# Altium PCB Serial Power Supply.PcbDoc (part 1 of 2)
Units mm, origin at the board's own origin, x right, y up, seen from the top; angles counter-clockwise.
Board outline 122 x 87 mm, 4 copper layers (Top Layer, Signal Layer 1, Signal Layer 2, Bottom Layer), stack 0.844 mm thick; 122 components, 75 nets, 373 pads, 97 vias.
Unrouted connection lines stored in the file: 7.
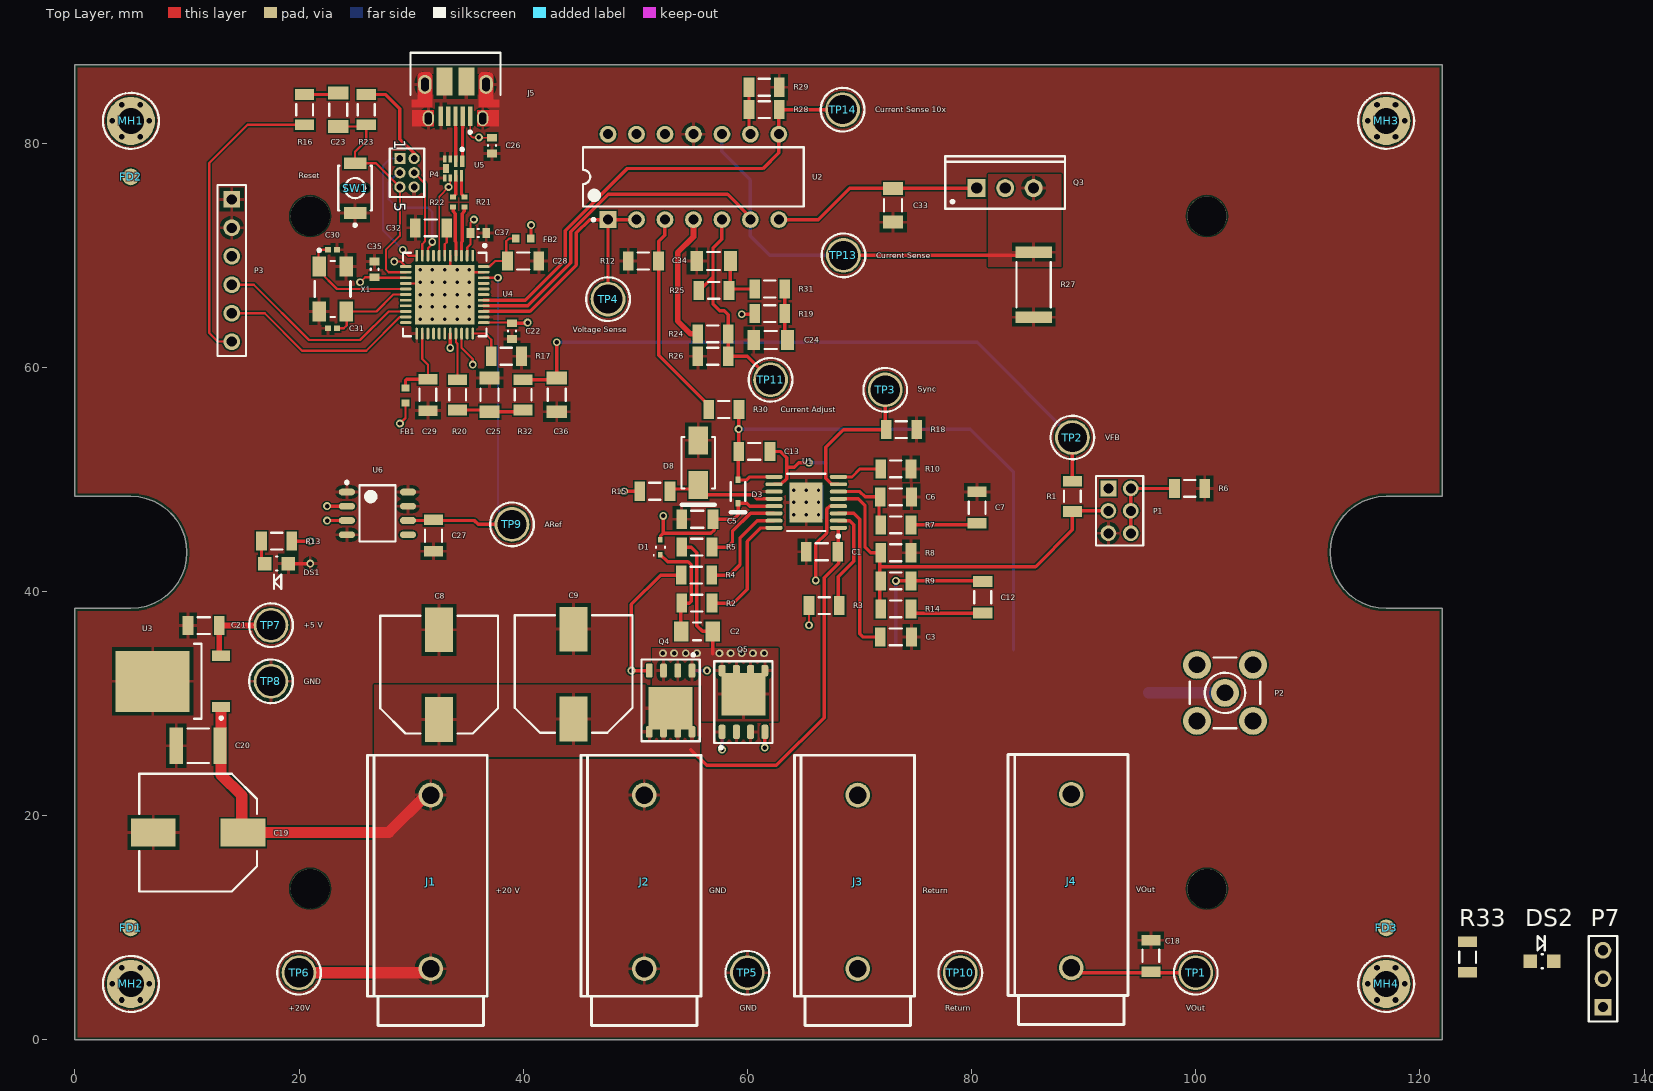
[diagram p0: Top Layer view]
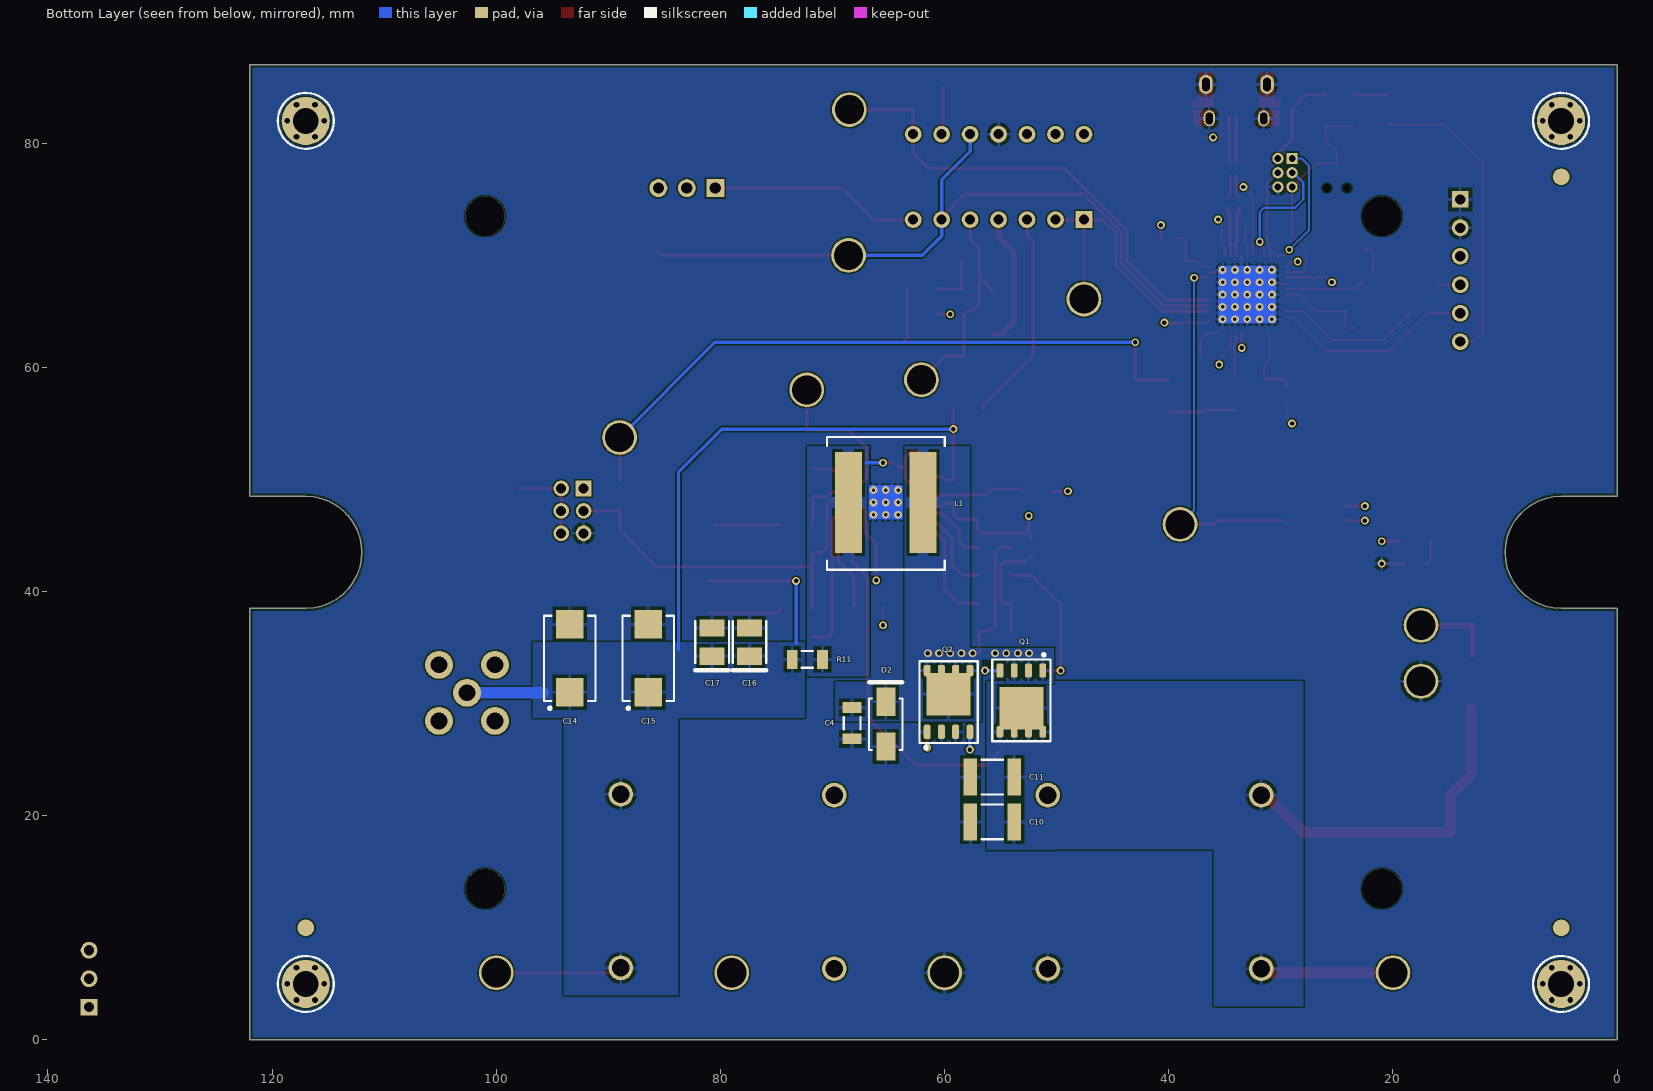
[diagram p1: Bottom Layer view, seen from below]
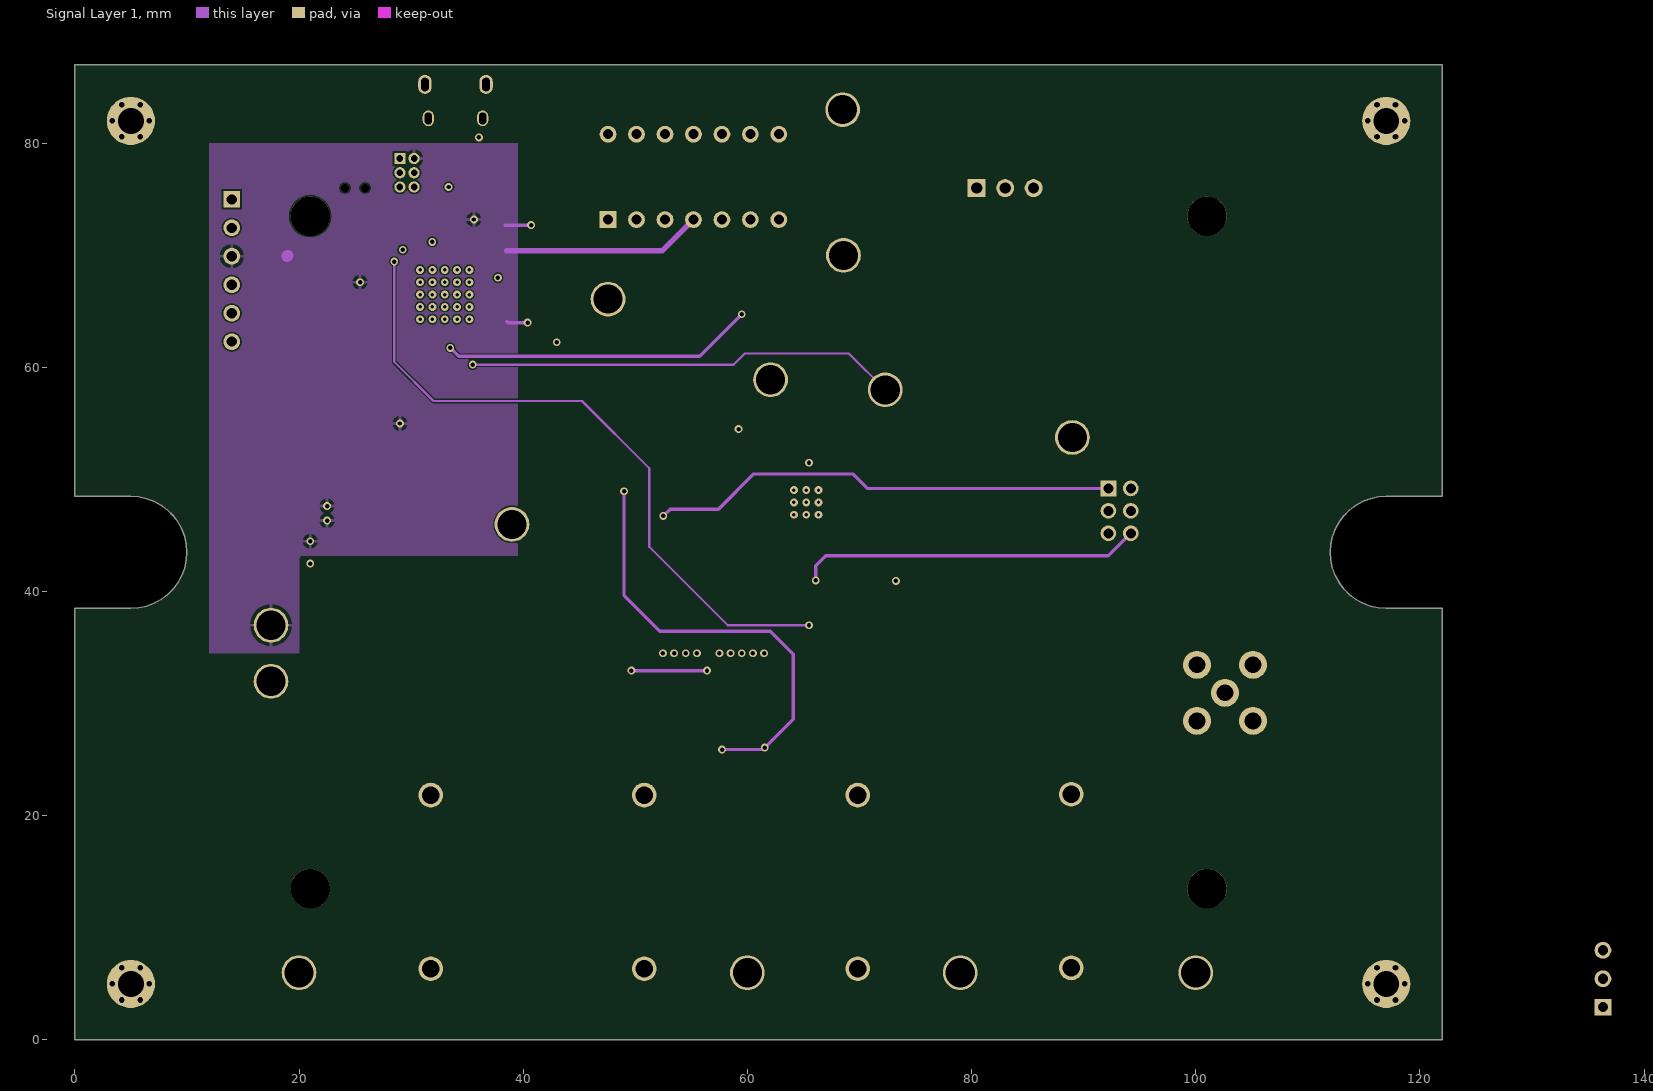
[diagram p2: Signal Layer 1]
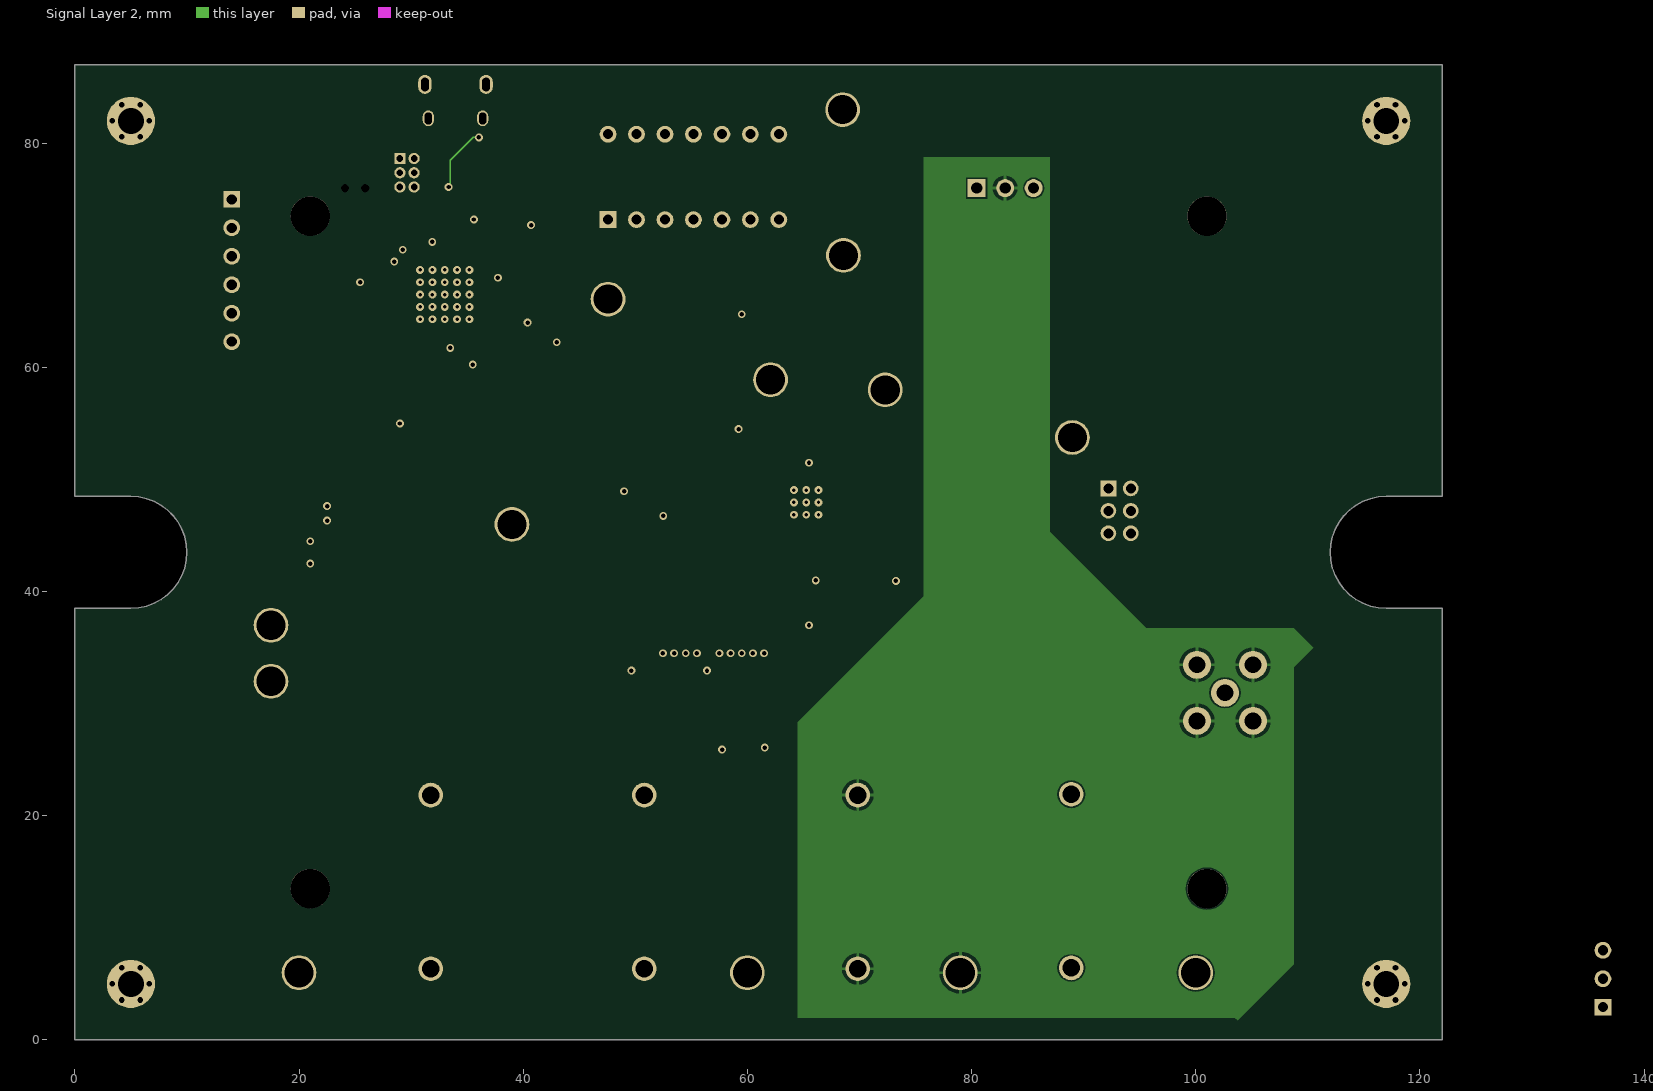
[diagram p3: Signal Layer 2]
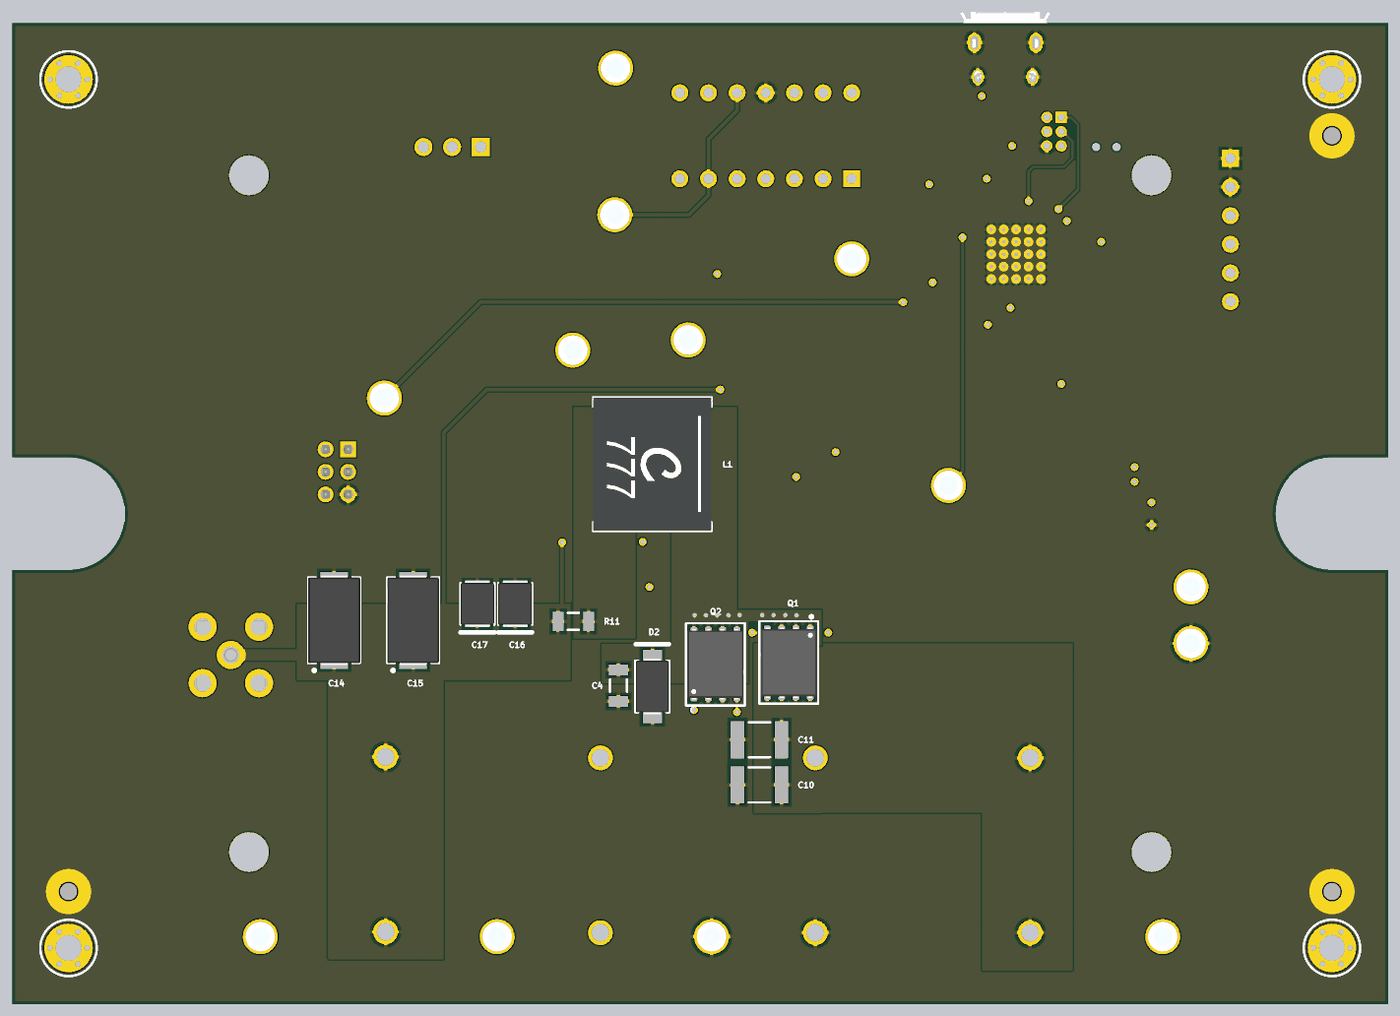
[diagram p5: 3D render of the assembled board from below, using the file's embedded part models]

## Layer stack, top to bottom
Top Solder: solder mask 0.0102, Solder Resist, Dk 3.5
Top Layer: signal copper 0.0356
Dielectric 1: core 0.32, FR-4, Dk 4.8
Signal Layer 1: signal copper 0.036
Dielectric 3: prepreg 0.127, Dk 4.2
Signal Layer 2: signal copper 0.036
Dielectric 2: core 0.254, Dk 4.2
Bottom Layer: signal copper 0.0356
Bottom Solder: solder mask 0.0102, Solder Resist, Dk 3.5

## Board outline
0,38.5 0,0 122,0 122,38.5 117,38.5 116.288,38.551 115.591,38.703 114.923,38.952 114.297,39.294 113.726,39.721 113.221,40.226 112.794,40.797 112.452,41.423 112.203,42.091 112.051,42.788 112,43.5 112.051,44.212 112.203,44.909 112.452,45.577 112.794,46.203 113.221,46.774 113.726,47.279 114.297,47.706 114.923,48.048 115.591,48.297 116.288,48.449 117,48.5 122,48.5 122,87 0,87 0,48.5 5,48.5 5.712,48.449 6.409,48.297 7.077,48.048 7.703,47.706 8.274,47.279 8.779,46.774 9.206,46.203 9.548,45.577 9.797,44.909 9.949,44.212 10,43.5 9.949,42.788 9.797,42.091 9.548,41.423 9.206,40.797 8.779,40.226 8.274,39.721 7.703,39.294 7.077,38.952 6.409,38.703 5.712,38.551 5,38.5

## Design rules (kind name [scope] priority, off if disabled: settings)
BoardOutlineClearance [All] p1: gap=0.26 ignorepadtopadclearanceinfootprint=FALSE
Clearance "Pad-Pad Clearance" [All] p1 off: gap=0.15 ignorepadtopadclearanceinfootprint=FALSE except(0: Arc-Hole Track-Hole SMDPad-Hole THPad-Hole Via-Hole Fill-Hole Poly-Hole Region-Hole Text-Hole)
Clearance "Via-Pad Clearance" [IsVia vs IsPad] p2: gap=0.15 ignorepadtopadclearanceinfootprint=FALSE except(0: Arc-Hole Track-Hole SMDPad-Hole THPad-Hole Via-Hole Fill-Hole Poly-Hole Region-Hole Text-Hole)
Clearance "General Clearance" [All] p3: gap=0.127 ignorepadtopadclearanceinfootprint=FALSE
ComponentClearance [All] p1: gap=0.25 collisioncheckmode=3 verticalgap=0.25 showdistances=TRUE
DiffPairsRouting [All] p1: maxlimit=0.3 minlimit=0.225 mostfreqgap=0.25 toplayer_minwidth=0.25 toplayer_maxwidth=0.3 toplayer_prefwidth=0.275 midlayer1_minwidth=0.25 midlayer1_maxwidth=0.3 midlayer1_prefwidth=0.275 midlayer2_minwidth=0.25 midlayer2_maxwidth=0.3 midlayer2_prefwidth=0.275 bottomlayer_minwidth=0.25 bottomlayer_maxwidth=0.3 bottomlayer_prefwidth=0.275 maxuncoupledlength=12
FabricationTestPointUsage TestPointUsage [All] p1: valid=0 allowmultiple=FALSE
FabricationTestpoint Testpoint [All] p1: side=3 testpointundercomponent=TRUE minsize=1.016 maxsize=2.54 preferedsize=1.524 minholesize=0 maxholesize=1.016 preferedholesize=0.813 testpointgrid=0.025 allowsidetop=TRUE allowsidebottom=TRUE usegrid=TRUE gridtolerance=0
Height [All] p1: minheight=0 maxheight=20 prefheight=1.25
HoleSize HoleSize_VIA [IsVia] p1: absolutevalues=TRUE maxlimit=1 minlimit=0.305 maxpercent=80.000 minpercent=20.000
HoleSize HoleSize_NonPlated [(ObjectKind = 'Pad') And (PadIsPlated = 'False')] p2: absolutevalues=TRUE maxlimit=200 minlimit=0.2 maxpercent=80.000 minpercent=20.000
HoleSize [All] p3: absolutevalues=TRUE maxlimit=6 minlimit=0.305 maxpercent=80.000 minpercent=20.000
HoleToHoleClearance [All] p1: gap=0.25 allowstackedmicrovias=TRUE
MatchedLengths DiffPair_MatchedLengths [IsDifferentialPair] p1: tolerance=25 checknetsindiffpair=TRUE checkdiffpairvsdiffpair=FALSE checkxsignals=FALSE checkothers=FALSE
MinimumAnnularRing MinimumAnnularRing_VIA [IsVia] p1: minimumring=0.102
MinimumAnnularRing MinimumAnnularRing_NonPlated [(ObjectKind = 'Pad') And (PadIsPlated = 'False')] p2 off: minimumring=-100
MinimumAnnularRing [All] p3: minimumring=0.102
MinimumSolderMaskSliver [All] p1: minsoldermaskwidth=0.076
MinimumSolderMaskSliver SilkscreenOverComponentPads [All] p2 off: minsoldermaskwidth=0.254
PlaneClearance [All] p1: clearance=0.3
PlaneConnect [All] p1: planeconnectstyle=Relief reliefexpansion=0.5 reliefentries=4 reliefconductorwidth=0.25 reliefairgap=0.25
PolygonConnect PolygonConnect_2 [IsVia vs InNet('NetC2_2')] p1: connectstyle=Direct reliefconductorwidth=0.254 reliefentries=4 polygonreliefangle="90 Angle" airgapwidth=0.254
PolygonConnect PolygonConnect_1 [InComponent('L1')] p2: connectstyle=Relief reliefconductorwidth=1 reliefentries=4 polygonreliefangle="90 Angle" airgapwidth=0.25
PolygonConnect PolygonConnect_3 [InComponent('U1') vs IsVia] p3: connectstyle=Direct reliefconductorwidth=1 reliefentries=4 polygonreliefangle="90 Angle" airgapwidth=0.25
PolygonConnect [All] p4: connectstyle=Relief reliefconductorwidth=0.3 reliefentries=4 polygonreliefangle="90 Angle" airgapwidth=0.3
RoutingCorners [All] p1: cornerstyle=45-Degree minsetback=2.5 maxsetback=2.5
RoutingVias [All] p1: holewidth=0.4 width=0.7 viastyle="Through Hole" minholewidth=0.3 minwidth=0.35 maxholewidth=2 maxwidth=3
ShortCircuit ShortCircuit_NoNet [Net = 'No Net' vs Net = 'No Net'] p1: allowed=TRUE
ShortCircuit [All] p2: allowed=FALSE
SilkToSilkClearance [All] p1: silktosilkclearance=0.25
SilkToSolderMaskClearance [IsPad] p1: minsilkscreentomaskgap=0.2 clearancetoexposedcopper=TRUE
SolderMaskExpansion SolderMaskExpansion_VIA [IsVia] p1: expansion=-100
SolderMaskExpansion [All] p2: expansion=0.075
Width [All] p1: maxlimit=10 minlimit=0.127 preferedwidth=0.3
16 further rules are at their usual default settings.

## Classes and differential pairs
component class U_Mechanical: FD1 FD2 FD3 MH1 MH2 MH3 MH4 S1
component class "U_Current Regulator": C33 Q3 R24 R25 R26 R27 R28 R29 S1 TP10 TP11 TP13 TP14
component class U_Controller: C22 C23 C24 C25 C26 C27 C28 C29 C30 C31 C32 C34 C35 C36 C37 DS1 DS2 FB1 FB2 J5 P3 P4 P7 R13 R16 R17 R19 R20 R21 R22 R23 R31 R32 R33 SW1 TP9 U4 U5 U6 X1
component class "Serial Power Supply - Main": C19 C20 C21 J1 J2 J3 J4 P2 TP5 TP6 TP7 TP8 U3
component class "U_DC-DC Converter": C1 C2 C3 C4 C5 C6 C7 C8 C9 C10 C11 C12 C13 C14 C15 C16 C17 C18 C? D1 D2 D3 D4 D8 D? L1 P1 Q1 Q2 Q4 Q5 R1 R2 R3 R4 R5 R6 R7 R8 R9 R10 R11 R12 R14 R15 R18 R30 TP1 TP2 TP3 TP4 U1 U2
differential pair USB_2: +USB_2_P -USB_2_N
differential pair USB_1: +USB_1_P -USB_1_N
differential pair USB: +USB_P -USB_N

## Components (designator, comment, footprint, x,y, rotation, side; value= is the part's Value field where it differs from the comment)
C1 "CAP 470nF 100V 1206(3216)" CAPC1206(3216)130_L 66.65,43.556 r0 top value=470nF
C2 "C1206C104K5RACTU" KEMT-1206-2_N 55.497,36.456 r0 top
C3 "CAP 1.5nF 50V 1206(3216)" CAPC1206(3216)170_L 73.25,35.956 r180 top value=1.5nF
C4 "CAP 470pF 50V 1206(3216)" CAPC1206(3216)100_L 68.25,28.261 r90 bottom value=470pF
C5 "CAP 1uF 25V 1206(3216)" CAPC1206(3216)190_L 55.539,46.456 r0 top value=1uF
C6 "CAP 100pF 50V 1206(3216)" CAPC1206(3216)170_L 73.25,48.456 r180 top value=100pF
C7 "CAP 2.2nF 50V 1206(3216)" CAPC1206(3216)130_L 80.5,47.5 r270 top value=2.2nF
C8 "UCZ1J470MCS1GS" NIC-CAPA2-10X10_V 32.5,32.595 r90 top locked
C9 "UCZ1J470MCS1GS" NIC-CAPA2-10X10_V 44.5,32.65 r90 top locked
C10 "CAP 2.2uF 100V 1812(4532)" CAPC1812(4532)280_L 55.75,19.456 r180 bottom value=2.2uF
C11 "CAP 2.2uF 100V 1812(4532)" CAPC1812(4532)280_L 55.75,23.456 r180 bottom value=2.2uF
C12 "CAP 10nF 50V 1206(3216)" CAPC1206(3216)170_L 81,39.5 r90 top value=10nF
C13 "CAP1206" CAPC1206(3216)150_L 60.619,52.506 r0 top
C14 "TCJE686M025R0050" KEMT-520-D_N 93.45,34.05 r90 bottom
C15 "TCJE686M025R0050" KEMT-520-D_N 86.45,34.05 r90 bottom
C16 "TAJB226K016RNJ" AVX-TAJ-B-2_L 77.411,35.5 r90 bottom
C17 "TAJB226K016RNJ" AVX-TAJ-B-2_L 80.75,35.5 r90 bottom
C18 "CAP 1uF 25V 1206(3216)" CAPC1206(3216)190_L 96,7.5 r270 top value=1uF
C19 "UCZ1J470MCS1GS" NIC-CAPA2-10X10_V 11,18.5 r180 top
C20 "CAP 2.2uF 100V 1812(4532)" CAPC1812(4532)280_L 11,26.25 r0 top value=2.2uF
C21 "CAP 100nF 50V 1206(3216)" CAPC1206(3216)100_L 11.5,36.975 r180 top value=100nF
C22 "CAP 10uF 6.3V 0603(1608)" CAPC0603(1608)100_L 39,63.25 r90 top value=10uF
C23 "CAP 100nF 50V 1206(3216)" CAPC1206(3216)100_N 23.5,83 r270 top value=100nF
C24 "CAP 100nF 50V 1206(3216)" CAPC1206(3216)100_N 62.071,62.45 r180 top value=100nF
C25 "CAP 100nF 50V 1206(3216)" CAPC1206(3216)100_N 37,57.55 r90 top value=100nF
C26 "CAP 10uF 6.3V 0603(1608)" CAPC0603(1608)100_L 37.22,79.8 r90 top value=10uF
C27 "CAP 1uF 25V 1206(3216)" CAPC1206(3216)190_L 32,45 r90 top value=1uF
C28 "CAP 1uF 25V 1206(3216)" CAPC1206(3216)190_L 40,69.5 r180 top value=1uF
C29 "CAP 1uF 25V 1206(3216)" CAPC1206(3216)190_L 31.5,57.55 r90 top value=1uF
C30 "CAP 10pF 10V 0402(1005)" CAPC0402(1005)60_L 23,70.5 r180 top value=10pF
C31 "CAP 10pF 10V 0402(1005)" CAPC0402(1005)60_L 23,63.5 r0 top value=10pF
C32 "CAP 1uF 25V 1206(3216)" CAPC1206(3216)190_L 31.772,72.46 r0 top value=1uF
C33 "CAP 100nF 50V 1206(3216)" CAPC1206(3216)100_N 73,74.46 r270 top value=100nF
C34 "CAP 100nF 50V 1206(3216)" CAPC1206(3216)100_N 56.981,69.5 r180 top value=100nF
C35 "CAP 10uF 6.3V 0603(1608)" CAPC0603(1608)100_L 26.75,68.75 r270 top value=10uF
C36 "CAP 100nF 50V 1206(3216)" CAPC1206(3216)100_N 43,57.55 r270 top value=100nF
C37 "CAP 10uF 6.3V 0603(1608)" CAPC0603(1608)100_L 36,72 r180 top value=10uF
D1 "BAS16XV2T1" ONSC-SOD-523-2-502-01_V 52.25,43.956 r90 top
D2 "B160-13-F" DIOD-SMA-2_V 65.25,28.175 r90 bottom
D3 "1N4148WS-7-F" DIOD-SOD323-2-A_V 59.172,48.931 r270 top
D8 "B160-13-F" DIOD-SMA-2_V 55.62,51.5 r270 top
DS1 "LTST-C170GKT" LTST-C170GKT_V 18,42.5 r180 top
DS2 "LTST-C170GKT" LTST-C170GKT_V 130.907,7.026 r0 top
FB1 "BLM18HE152SN1D" MURA-BLM18-RF-H4-CHIP-2_V 29.5,57.5 r90 top
FB2 "BLM18HE152SN1D" MURA-BLM18-RF-H4-CHIP-2_V 40,71.5 r180 top
FD1 "Fiducial - Round" FID150X450 5,10 r0 top
FD2 "Fiducial - Round" FID150X450 5,77 r0 top
FD3 "Fiducial - Round" FID150X450 117,10 r0 top
J1 "+20 V" PCB-1KEG917TFGGG2K36Z9ZW-1 31.369,23.755 r270 top locked
J2 "GND" PCB-1KEG917TFGGG2K36Z9ZW-1 50.419,23.755 r270 top locked
J3 "Return" PCB-1KEG917TFGGG2K36Z9ZW-1 69.469,23.755 r270 top
J4 "VOut" PCB-1KEG917TFGGG2K36Z9ZW-1 88.519,23.834 r270 top locked
J5 "10103594-0001LF" FCI-10103594-0001LF_V 33.963,83.86 r180 top
L1 "XAL1010-682MEB" INDP113100X100N 65.25,47.956 r0 bottom
MH1 "Mounting-Hole-Screw" MTG_M2_PV 5,82 r0 top locked
MH2 "Mounting-Hole-Screw" MTG_M2_PV 5,5 r0 top locked
MH3 "Mounting-Hole-Screw" MTG_M2_PV 117,82 r0 top locked
MH4 "Mounting-Hole-Screw" MTG_M2_PV 117,5 r0 top locked
P1 "TMMH-103-06-T-D" SMTC-TMMH-103-06-X-D 92.212,49.206 r270 top
P2 "SMB" SMB_V-RJ45 102.612,30.971 r0 top
P3 "Header 6" HDR1X6 14,75 r270 top
P4 "MHDR2X3" MHDR2X3 29,78.64 r270 top
P7 "Header 3" HDR1X3 136.332,2.925 r90 top
Q1 "Si7370" SOIC127P620X112_HS-9N 51.25,32.956 r270 bottom
Q2 "Si7370" SOIC127P620X112_HS-9N 61.56,27.491 r90 bottom
Q3 "MTP3055" TO-220AB 83,76 r0 top
Q4 "Si7370" SOIC127P620X112_HS-9N 55.06,32.956 r270 top
Q5 "Si7370" SOIC127P620X112_HS-9N 57.75,27.491 r90 top
R1 "10K 1% 1206(3216)" RESC1206(3216)_L 89,48.5 r270 top value="10000.00 Ohm"
R2 "Jumper 1206(3216)" RESC1206(3216)_L 55.5,38.968 r180 top value="0.00 Ohm"
R3 "100K 1% 1206(3216)" RESC1206(3216)_L 66.85,38.75 r0 top value="100K Ohms"
R4 "Jumper 1206(3216)" RESC1206(3216)_L 55.46,41.468 r180 top value="0.00 Ohm"
R5 "Jumper 1206(3216)" RESC1206(3216)_L 55.5,43.968 r180 top value="0.00 Ohm"
R6 "5M1 1% 1206(3216)" RESC1206(3216)_L 99.462,49.206 r180 top value="5100000.00 Ohm"
R7 "30K9 1% 1206(3216)" RESC1206(3216)_L 73.25,45.956 r180 top value="30.9K Ohm"
R8 "10K 1% 1206(3216)" RESC1206(3216)_L 73.25,43.468 r180 top value="10000.00 Ohm"
R9 "100K 1% 1206(3216)" RESC1206(3216)_L 73.25,40.956 r0 top value="100000.00 Ohm"
R10 "118K 1% 1206(3216)" RESC1206(3216)_L 73.25,50.956 r180 top value="118K Ohm"
R11 "WSLP12066L000FEA" RESC1206(3216)_L 72.25,33.956 r0 bottom value="6 mOhm"
R12 "10K 1% 1206(3216)" RESC1206(3216)_L 50.725,69.5 r180 top value="10000.00 Ohm"
R13 "10K 1% 1206(3216)" RESC1206(3216)_L 18,44.5 r180 top value="10000.00 Ohm"
R14 "Jumper 1206(3216)" RESC1206(3216)_L 73.25,38.456 r0 top value="0.00 Ohm"
R15 "Jumper 1206(3216)" RESC1206(3216)_L 51.75,48.956 r180 top value="0.00 Ohm"
R16 "Jumper 1206(3216)" RESC1206(3216)_L 20.5,83 r90 top value="0.00 Ohm"
R17 "10K 1% 1206(3216)" RESC1206(3216)_L 38.5,61 r0 top value="10000.00 Ohm"
R18 "100K 1% 1206(3216)" RESC1206(3216)_L 73.75,54.456 r180 top value="100K Ohms"
R19 "5K1 1% 1206(3216)" RESC1206(3216)_L 62,64.8 r180 top value="5.1K Ohm"
R20 "5K1 1% 1206(3216)" RESC1206(3216)_L 34.15,57.55 r90 top value="5.1K Ohm"
R21 "22R 1% 0402(1005)" RESC0402(1005)_L 34.75,74.75 r270 top value="22.00 Ohm"
R22 "22R 1% 0402(1005)" RESC0402(1005)_L 33.75,74.75 r270 top value="22.00 Ohm"
R23 "10K 1% 1206(3216)" RESC1206(3216)_L 26,83 r90 top value="10000.00 Ohm"
R24 "Jumper 1206(3216)" RESC1206(3216)_L 56.931,63 r180 top value="0.00 Ohm"
R25 "300K 1% 1206(3216)" RESC1206(3216)_L 57.015,66.875 r180 top value="300K Ohm"
R26 "10K 1% 1206(3216)" RESC1206(3216)_L 56.931,61 r0 top value="10000.00 Ohm"
R27 "0.01Ohms 1% 2512(6432)" RESC2512(6432)_L 85.54,67.38 r90 top value="0.01 Ohms"
R28 "90K9 1% 1206(3216)" RESC1206(3216)_L 61.5,83 r0 top value="90900.00 Ohm"
R29 "10K 1% 1206(3216)" RESC1206(3216)_L 61.5,85 r180 top value="10000.00 Ohm"
R30 "150K 1% 1206(3216)" RESC1206(3216)_L 57.9,56.25 r0 top value="150000.00 Ohm"
R31 "5K1 1% 1206(3216)" RESC1206(3216)_L 62,67 r0 top value="5.1K Ohm"
R32 "5K1 1% 1206(3216)" RESC1206(3216)_L 40,57.55 r270 top value="5.1K Ohm"
R33 "10K 1% 1206(3216)" RESC1206(3216)_L 124.256,7.401 r90 top value="10000.00 Ohm"
SW1 "Reset" JNFU-TVAF06_V 25,76 r90 top
TP1 "VOut" KSTN-1502-2 100,6 r0 top locked
TP2 "VFB" KSTN-1502-2 89,53.75 r0 top
TP3 "Sync" KSTN-1502-2 72.3,58 r0 top
TP4 "Voltage Sense" KSTN-1502-2 47.571,66.093 r90 top
TP5 "GND" KSTN-1502-2 60,6 r0 top locked
TP6 "+20V" KSTN-1502-2 20,6 r0 top locked
TP7 "+5 V" KSTN-1502-2 17.5,37.006 r0 top
TP8 "GND" KSTN-1502-2 17.5,32 r0 top
TP9 "ARef" KSTN-1502-2 39,46 r0 top
TP10 "Return" KSTN-1502-2 79,6 r0 top locked
TP11 "Current Adjust" KSTN-1502-2 62.071,58.9 r270 top
TP13 "Current Sense" KSTN-1502-2 68.575,70 r90 top
TP14 "Current Sense 10x" KSTN-1502-2 68.5,83 r90 top
U1 "LT3845MPFE" LT-FE-16-EPV-BC_N 65.25,47.956 r180 top locked
U2 "LM324N" N14A 55.191,77 r90 top locked
U3 "LM78M05CDT" TD03B_L 8.75,32 r180 top
U4 "ATmega32U4-MU" 44PW_M 33,66.5 r270 top
U5 "EMI2121MTTAG" ONSC-WDFN-8-511BN_V 33.75,77.75 r270 top
U6 "LM4140ACM10NOPB" D0008A_N 27,46.981 r0 top
X1 "ABM3B-16.000MHZ-B2-T" ABRA-ABM3B-4_V 23,67 r270 top

## Footprints (in the part's own frame and the unit in brackets; to place one, negate y for a bottom-side part, rotate by r counter-clockwise, add the part's x,y. Pads: shape width x height; smd on the part's side, far side on the other; paste and mask are expansions set on the pad)
44PW_M [mm] "QFN, 44-Leads, Body 7x7mm, Pitch 0.5mm, Thermal Pad 5.3x5.3mm, IPC Low Density"
  oval 1.05x0.25 smd: 1(-3.475,2.5) 2(-3.475,2) 3(-3.475,1.5) 4(-3.475,1) 5(-3.475,0.5) 6(-3.475,0) 7(-3.475,-0.5) 8(-3.475,-1) 9(-3.475,-1.5) 10(-3.475,-2) 11(-3.475,-2.5) 23(3.475,-2.5) 24(3.475,-2) 25(3.475,-1.5) 26(3.475,-1) 27(3.475,-0.5) 28(3.475,0) 29(3.475,0.5) 30(3.475,1) 31(3.475,1.5) 32(3.475,2) 33(3.475,2.5)
  oval 0.25x1.05 smd: 12(-2.5,-3.475) 13(-2,-3.475) 14(-1.5,-3.475) 15(-1,-3.475) 16(-0.5,-3.475) 17(0,-3.475) 18(0.5,-3.475) 19(1,-3.475) 20(1.5,-3.475) 21(2,-3.475) 22(2.5,-3.475) 34(2.5,3.475) 35(2,3.475) 36(1.5,3.475) 37(1,3.475) 38(0.5,3.475) 39(0,3.475) 40(-0.5,3.475) 41(-1,3.475) 42(-1.5,3.475) 43(-2,3.475) 44(-2.5,3.475)
  rect 5.3x5.3 smd: 45(0,0)
  silkscreen extent -4.5,-3.73 3.73,3.72, body extent -3.57,-3.58 3.58,3.57, height 0.9
ABRA-ABM3B-4_V [mm] "SMD, 4-Leads, Body 5x3.2mm"
  rect 1.8x1.2 smd: 1(-2,-1.2) 2(2,-1.2) 3(2,1.2) 4(-2,1.2)
  silkscreen extent -3.57,-1.6 2.5,1.6, body extent -2.5,-1.59 2.5,1.59, height 1.13
AVX-TAJ-B-2_L [mm] "Molded Capacitor, 2-Leads, Body 3.7x3mm, IPC High Density"
  rect 1.55x2.2 smd: 1(-1.25,0) 2(1.25,0)
  silkscreen extent -2.52,-1.5 1.85,1.5, body extent -2.07,-1.5 2.07,1.5, height 2.1
CAPC0402(1005)60_L [mm] "Chip Capacitor, Body 1.0x0.5mm, Height 0.6mm, IPC High Density"
  rect 0.52x0.52 smd: 1(-0.4,0) 2(0.4,0)
  body extent -0.55,-0.3 0.55,0.3, height 0.6
CAPC0603(1608)100_L [mm] "Chip Capacitor, Body 1.6x0.8mm, Height 1.0mm, IPC High Density"
  rect 0.7x0.9 smd: 1(-0.7,0) 2(0.7,0)
  silkscreen extent -0.05,-0.35 0.05,0.35, body extent -0.87,-0.47 0.88,0.48, height 1
CAPC1206(3216)100_L [mm] "Chip Capacitor, Body 3.2x1.6mm, Height 1mm, IPC High Density"
  rect 0.95x1.7 smd: 1(-1.4,0) 2(1.4,0)
  silkscreen extent -0.55,-0.75 0.55,0.75, body extent -1.7,-0.9 1.7,0.9, height 1
CAPC1206(3216)100_N [mm] "Chip Capacitor, Body 3.2x1.6mm, Height 1mm, IPC Medium Density"
  rect 1.15x1.8 smd: 1(-1.5,0) 2(1.5,0)
  silkscreen extent -0.55,-0.8 0.55,0.8, body extent -1.7,-0.9 1.7,0.9, height 1
CAPC1206(3216)130_L [mm] "Chip Capacitor, Body 3.2x1.6mm, Height 1.3mm, IPC High Density"
  rect 0.95x1.7 smd: 1(-1.4,0) 2(1.4,0)
  silkscreen extent -0.55,-0.75 0.55,0.75, body extent -1.7,-0.9 1.7,0.9, height 1.3
CAPC1206(3216)150_L [mm]
  rect 0.95x1.7 smd: 1(-1.4,0) 2(1.4,0)
  silkscreen extent -0.55,-0.75 0.55,0.75, body extent -1.7,-0.9 1.7,0.9, height 1.5
CAPC1206(3216)170_L [mm] "Chip Capacitor, Body 3.2x1.6mm, Height 1.7mm, IPC High Density"
  rect 0.95x1.7 smd: 1(-1.4,0) 2(1.4,0)
  silkscreen extent -0.55,-0.75 0.55,0.75, body extent -1.7,-0.9 1.7,0.9, height 1.7
CAPC1206(3216)190_L [mm] "Chip Capacitor, Body 3.2x1.6mm, Height 1.9mm, IPC High Density"
  rect 0.95x1.7 smd: 1(-1.4,0) 2(1.4,0)
  silkscreen extent -0.55,-0.75 0.55,0.75, body extent -1.7,-0.9 1.7,0.9, height 1.9
CAPC1812(4532)280_L [mm] "Chip Capacitor, Body 4.5x3.2mm, Height 2.8mm, IPC High Density"
  rect 1.2x3.3 smd: 1(-1.95,0) 2(1.95,0)
  silkscreen extent -0.95,-1.55 0.95,1.55, body extent -2.4,-1.7 2.4,1.7, height 2.8
D0008A_N [mm] "SOIC, 8-Leads, Body 5x4mm, Pitch 1.27mm, IPC Medium Density"
  oval 1.45x0.6 smd: 1(-2.725,1.905) 2(-2.725,0.635) 3(-2.725,-0.635) 4(-2.725,-1.905) 5(2.725,-1.905) 6(2.725,-0.635) 7(2.725,0.635) 8(2.725,1.905)
  silkscreen extent -2.85,-2.5 1.6,2.88, body extent -3,-2.45 3,2.45, height 1.63
DIOD-SMA-2_V [mm] "Molded Diode, 2-Leads, Body 4.6x2.92mm"
  rect 2.5x1.7 smd: 1(-2,0) 2(2,0)
  silkscreen extent -2.3,-1.5 3.75,1.5, body extent -2.52,-1.46 2.52,1.46, height 2.4
DIOD-SOD323-2-A_V [mm] "SOD-323, 2-Leads, Body 1.7x1.3mm"
  rect 0.59x0.45 smd: 1(-1.055,0) 2(1.055,0)
  silkscreen extent -0.85,-0.65 1.85,0.65, body extent -0.85,-0.65 0.85,0.65, height 1.2
FCI-10103594-0001LF_V [mm] "SMD, 5-Leads, Body 8.04x5.62mm, Pitch 0.65 mm"
  rect 0.4x1.75 smd: 1(-1.3,1.435) 2(-0.65,1.435) 3(0,1.435) 4(0.65,1.435) 5(1.3,1.435)
  oval 1x1.4 hole 0.65 slot 1.05 at 90 deg: 6(-2.425,1.64) 7(2.425,1.64)
  oval 1.2x1.7 hole 0.7 slot 1.2 at 90 deg: 8(2.725,-1.39) 9(-2.725,-1.39)
  rect 1.425x2.5 smd: 10(-0.962,-1.64) 11(0.962,-1.64)
  Top Layer region: -3.9,0.91 -1.9,0.91 -1.9,2.37 -3.9,2.37
  Top Layer region: 3.9,2.37 1.9,2.37 1.9,0.91 3.9,0.91
  Top Layer region: -3.375,-0.04 -3.375,-2.09 -3.373,-2.129 -3.369,-2.167 -3.365,-2.185 -3.359,-2.203 -3.348,-2.239 -3.329,-2.277 -3.308,-2.312 -3.284,-2.344 -3.258,-2.374 -3.227,-2.401 -3.194,-2.426 -3.158,-2.446 -3.121,-2.464 -3.08,-2.477 -3.049,-2.483 -3.012,-2.488 -2.975,-2.49 -2.475,-2.49 -2.432,-2.488 -2.391,-2.482 -2.351,-2.471 -2.312,-2.456 -2.28,-2.439 -2.249,-2.421 -2.217,-2.397 -2.19,-2.37 -2.164,-2.342 -2.143,-2.312 -2.121,-2.277 -2.105,-2.241 -2.093,-2.209 -2.088,-2.192 -2.084,-2.175 -2.08,-2.155 -2.076,-2.134 -2.075,-2.112 -2.075,-2.09 -2.075,-0.04 -2.075,0.66 -3.9,0.66 -3.9,-0.04
  Top Layer region: 3.375,-0.04 3.375,-2.09 3.373,-2.129 3.369,-2.167 3.365,-2.185 3.359,-2.203 3.348,-2.239 3.329,-2.277 3.308,-2.312 3.284,-2.344 3.258,-2.374 3.227,-2.401 3.194,-2.426 3.158,-2.446 3.121,-2.464 3.08,-2.477 3.049,-2.483 3.012,-2.488 2.975,-2.49 2.475,-2.49 2.432,-2.488 2.391,-2.481 2.351,-2.471 2.312,-2.456 2.28,-2.439 2.249,-2.421 2.217,-2.396 2.19,-2.37 2.164,-2.342 2.143,-2.312 2.121,-2.277 2.105,-2.241 2.093,-2.209 2.088,-2.192 2.084,-2.175 2.08,-2.155 2.076,-2.134 2.075,-2.112 2.075,-2.09 2.075,-0.04 2.075,0.66 3.9,0.66 3.9,-0.04
  silkscreen extent -4.02,-4.21 4.02,2.98, body extent -4.02,-4.15 4.02,1.88, height 2.9
FID150X450 [mm] "Fiducial, Round, 1.5mm Pad, 4.5mm SM, Top and Bottom"
  round 1.5 smd mask+1.25: 1(0,0)
  round 1.5 smd far side mask+1.25: 2(0,0)
HDR1X3 [mm] "Connector; Header; 3 Position"
  rect 1.5x1.5 hole 0.9: 1(0,0)
  round 1.5 hole 0.9: 2(2.54,0) 3(5.08,0)
  silkscreen extent -1.27,-1.27 6.35,1.27
HDR1X6 [mm] "Connector; Header; 6 Position"
  rect 1.5x1.5 hole 0.9: 1(0,0)
  round 1.5 hole 0.9: 2(2.54,0) 3(5.08,0) 4(7.62,0) 5(10.16,0) 6(12.7,0)
  silkscreen extent -1.27,-1.27 13.97,1.27
INDP113100X100N [mm] "Precision Wire Wound Inductor, 2-Leads, Body 11.30x10.00mm, IPC Medium Density"
  rect 2.38x9 smd: 1(-3.325,0) 2(3.325,0)
  silkscreen extent -5.25,-5.85 5.25,6.01, body extent -5.25,-5.84 5.25,5.96, height 9.9
JNFU-TVAF06_V [mm] "Switch, Push Button, SMD, 2-Leads, Body 3x4mm"
  rect 1.05x2 smd: 1(-2.225,0) 2(2.225,0)
  round 0.4 hole 0.75 unplated: MH1(0,0.9) MH2(0,-0.9)
  silkscreen extent -3.42,-1.5 2,1.5, body extent -2,-1.5 2,1.5, height 2
KEMT-520-D_N [mm] "Molded Capacitor, 2-Leads, Body 7.6x4.6mm, IPC Medium Density"
  rect 2.55x2.45 smd: 1(-3.025,0) 2(3.025,0)
  silkscreen extent -4.57,-2.3 3.8,2.3, body extent -4.02,-2.3 4.02,2.3, height 3.1
KEMT-1206-2_N [mm] "SMD, 2-Leads, Body 3.4x1.8mm, IPC Medium Density"
  rect 1.3x1.8 smd: 1(-1.4,0) 2(1.4,0)
  silkscreen extent -0.35,-0.8 0.35,0.8, body extent -1.7,-0.9 1.7,0.9, height 0.88
KSTN-1502-2 [mm] "Terminal DBL Turret, Dia 3.18mm"
  round 3.1 hole 2.6: 1(0,0)
  silkscreen extent -1.95,-1.95 1.95,1.95, body extent -1.59,-1.59 1.59,1.59, height 5.56
LT-FE-16-EPV-BC_N [mm] "SOP, 16-Leads, Body 5.1x4.5mm, Pitch 0.65mm, Thermal Pad 3.58x2.94mm, IPC Medium Density"
  oval 1.55x0.35 smd: 1(-2.875,2.275) 2(-2.875,1.625) 3(-2.875,0.975) 4(-2.875,0.325) 5(-2.875,-0.325) 6(-2.875,-0.975) 7(-2.875,-1.625) 8(-2.875,-2.275) 9(2.875,-2.275) 10(2.875,-1.625) 11(2.875,-0.975) 12(2.875,-0.325) 13(2.875,0.325) 14(2.875,0.975) 15(2.875,1.625) 16(2.875,2.275)
  rect 2.94x3.58 smd: 17(0,0)
  silkscreen extent -3,-2.55 1.7,3.12, body extent -2.25,-2.55 2.25,2.55, height 1.1
LTST-C170GKT_V [mm] "SMD, 2-Leads, Body 2x1.25mm"
  rect 1.2x1.2 smd: 1(-1.05,0) 2(1.05,0)
  silkscreen extent -0.41,-0.63 0.23,2.25, body extent -1,-0.63 1,0.63, height 1.1
MHDR2X3 [mm] "Connector; Header; 3x2 Position"
  rect 1x1 hole 0.6: 1(0,0)
  round 1 hole 0.6: 2(0,1.27) 3(1.27,0) 4(1.27,1.27) 5(2.54,0) 6(2.54,1.27)
  silkscreen extent -0.9,-0.9 3.44,2.17
MTG_M2_PV [mm] "Mounting Hole, M2, Plated, with Supporting Vias"
  round 4.3 hole 2.3: MH(0,0)
  silkscreen extent -2.5,-2.5 2.5,2.5
MURA-BLM18-RF-H4-CHIP-2_V [mm] "Chip Ferrite Bead, 2-Leads, Body 1.6x0.8mm, Height 0.95mm, Reflow"
  rect 0.65x0.7 smd: 1(-0.675,0) 2(0.675,0)
  body extent -0.8,-0.4 0.8,0.4, height 0.95
N14A [mm] "DIP, 14-Pin, Row Spacing 7.62 mm, Pitch 2.54 mm"
  rect 1.5x1.5 hole 0.9: 1(-3.81,7.62)
  round 1.5 hole 0.9: 2(-3.81,5.08) 3(-3.81,2.54) 4(-3.81,0) 5(-3.81,-2.54) 6(-3.81,-5.08) 7(-3.81,-7.62) 8(3.81,-7.62) 9(3.81,-5.08) 10(3.81,-2.54) 11(3.81,0) 12(3.81,2.54) 13(3.81,5.08) 14(3.81,7.62)
  silkscreen extent -3.93,-9.85 2.65,9.85, body extent -3.55,-9.85 3.55,9.85, height 5.33
NIC-CAPA2-10X10_V [mm] "Aluminum Electrolytic Capacitor, Diameter 10mm, Height 10.8mm, Pitch 8mm"
  rect 4x2.5 smd: 1(-4,0) 2(4,0)
  silkscreen extent -5.25,-5.25 5.25,5.25, body extent -4.96,-4.99 5,4.99, height 10.8
ONSC-SOD-523-2-502-01_V [mm] "SOD, 2-Leads, Body 1.2x0.8mm"
  rect 0.48x0.4 smd: 1(-0.66,0) 2(0.66,0)
  silkscreen extent -0.75,-0.4 0.07,0.65, body extent -0.6,-0.4 0.6,0.4, height 0.7
ONSC-WDFN-8-511BN_V [mm] "SON, 8-Leads, Body 2.2x2mm, Pitch 0.5mm, Thermal Pad 0.8x0.54mm"
  rect 1x0.4 smd mask+0: 1(-0.65,0.8)
  rect 1x0.3 smd mask+0: 2(-0.65,0.25) 7(0.65,0.25) 8(0.65,0.75)
  rect 0.6x0.3 smd mask+0: 3(-0.85,-0.25) 4(-0.85,-0.75) 5(0.85,-0.75) 6(0.85,-0.25)
  rect 0.8x0.54 smd mask+0: 9(0,-0.63)
  silkscreen extent -1.82,0.68 -1.58,0.93, body extent -1,-1.1 1,1.1, height 0.8
PCB-1KEG917TFGGG2K36Z9ZW-1 [mm]
  round 2.2 hole 1.55: 1(1.905,0.381) 1(17.405,0.381)
  silkscreen extent -1.65,-5.27 22.45,5.43, body extent -1.56,-5.35 22.45,5.35, height 13
RESC0402(1005)_L [mm] "Chip Resistor, Body 1.0x0.5mm, IPC High Density"
  rect 0.45x0.55 smd: 1(-0.45,0) 2(0.45,0)
  body extent -0.52,-0.27 0.53,0.28, height 0.4
RESC1206(3216)_L [mm] "Chip Resistor, Body 3.2x1.6mm, IPC High Density"
  rect 0.95x1.7 smd: 1(-1.35,0) 2(1.35,0)
  silkscreen extent -0.5,-0.75 0.5,0.75, body extent -1.67,-0.87 1.67,0.87, height 0.75
RESC2512(6432)_L [mm] "Chip Resistor, Body 6.4x3.2mm, IPC High Density"
  rect 1.05x3.25 smd: 1(-2.9,0) 2(2.9,0)
  silkscreen extent -2,-1.52 2,1.53, body extent -3.25,-1.7 3.25,1.7, height 0.75
SMB_V-RJ45 [mm] "Connector; SMB Straight"
  round 2.5 hole 1.5: 1(0,0) 2(-2.5,-2.5) 2(-2.5,2.5) 2(2.5,-2.5) 2(2.5,2.5)
  silkscreen extent -3.15,-3.15 3.15,3.15, body extent -3.13,-3.13 3.13,3.13, height 9.51
SMTC-TMMH-103-06-X-D [mm] "Terminal Strip Assembly, 2x3 Pins, Vertical, 2mm Pitch, Male"
  rect 1.4x1.4 hole 0.889: 1(0,0)
  round 1.4 hole 0.889: 2(0,2) 3(2,0) 4(2,2) 5(4,0) 6(4,2)
  silkscreen extent -1.1,-1.1 5.1,3.1, body extent -1,-0.99 5,2.99, height 5.21
SOIC127P620X112_HS-9N [mm] "SOIC, 8-Leads, Body 5.10x6.15mm, Pitch 1.27mm, Thermal Pad 3.91x3.84mm, IPC Medium Density"
  rect 3.81x3.91 smd: D(3.36,-1.905)
  rrect50% 1.02x0.61 smd: D(5.465,-3.81) D(5.465,-2.54) D(5.465,-1.27) D(5.465,0)
  rrect50% 1.27x0.61 smd: G(0,-3.81) S(0,-2.54) S(0,-1.27) S(0,0)
  silkscreen extent -1.52,-4.5 6.3,0.69, body extent -0.45,-4.52 5.79,1.23, height 1.12
TD03B_L [mm] "D-PAK, 4-Leads, Body 6.1x6.6mm, Pitch 2.29mm, Lead Span 9.7mm, IPC High Density"
  rect 1.6x0.9 smd: 1(-4.3,2.28) 3(-4.3,-2.28)
  rect 6.6x5.45 smd: 4(1.8,0)
  silkscreen extent -4.43,-3.35 -1.9,3.4, body extent -2.55,-3.35 3.65,3.35, height 2.38
TO-220AB [mm] "TO, Thru-Hole, Vertical, Heatsink Mounted; 3 In-Line Leads; Pitch 2.54 mm"
  rect 1.6x1.6 hole 1: 1(-2.54,0)
  round 1.6 hole 1: 2(0,0) 3(2.54,0)
  silkscreen extent -5.35,-1.85 5.35,2.85, body extent -5.4,-1.9 5.4,2.9, height 19.3

## Part data
C1: library part CMP-1037-04578-1, "CAP 470nF 100V ±10% 1206 (3216 Metric) Thickness 1.3mm SMD", Case-EIA=1206, Case-Metric=3216, Rated Voltage="100 V", Supplier Part Number 1=810-C3216X5R2A474K1A, Tolerance=±10%, Max Thickness="1.3 mm", Supplier 1=Mouser, Technology=SMT
C2: library part CMP-2000-05169-1, "CAP, Ceramic, 0.1 uF, +/- 10%, 50 V, -55 to 125 degC, 1206 (3216 Metric), RoHS, Tape and Reel", Capacitance=0.1µF, Capacitance Tolerance=±10%, Capacitor Case Style=1206[3216Metric], Dielectric Characteristic=X7R, Manufacturer=Kemet, Operating Temperature Max=125degC, Operating Temperature Min=-55degC, Package Description="2-Leads SMD, Body 3.2 x 1.6 mm", Package Reference=1206-2, Voltage Rating=50V, Datasheet URL=https://datasheet.ciiva.com/6125/1725438-6125494.pdf, Datasheet Version=Jul-13, Manufacturer URL=http://www.kemet.com/, Packaging=Tape&Reel, Product Range=KEMET-CSeries, SVHC=ToBeAdvised
C3: library part CMP-1037-02618-1, "CAP 1.5nF 50V ±10% 1206 (3216 Metric) Thickness 1.7mm SMD", Case-EIA=1206, Case-Metric=3216, Rated Voltage="50 V", Tolerance=±10%, Max Thickness="1.7 mm", Technology=SMT
C4: library part CMP-1037-02150-1, "CAP 470pF 50V ±10% 1206 (3216 Metric) Thickness 1mm SMD", Case-EIA=1206, Case-Metric=3216, Rated Voltage="50 V", Tolerance=±10%, Max Thickness="1 mm", Technology=SMT
C5 C18 C27 C28 C29 C32: library part CMP-1037-04699-1, "CAP 1uF 25V ±5% 1206 (3216 Metric) Thickness 1.9mm SMD", Case-EIA=1206, Case-Metric=3216, Rated Voltage="25 V", Tolerance=±5%, Max Thickness="1.9 mm", Technology=SMT
C6: library part CMP-1037-01575-1, "CAP 100pF 50V ±10% 1206 (3216 Metric) Thickness 1.7mm SMD", Case-EIA=1206, Case-Metric=3216, Rated Voltage="50 V", Tolerance=±10%, Max Thickness="1.7 mm", Technology=SMT
C7: library part CMP-1037-02790-1, "CAP 2.2nF 50V ±10% 1206 (3216 Metric) Thickness 1.3mm SMD", Case-EIA=1206, Case-Metric=3216, Rated Voltage="50 V", Tolerance=±10%, Max Thickness="1.3 mm", Technology=SMT
C8 C9 C19: library part CMP-0687-00002-1, "Aluminum Electrolytic Capacitor, UD Series, Low Impedance, 470 uF, 25 V, + / - 20%, -55 to 105 degC, Chip Type, 10 x 10 mm D x L, Pb-Free, Reel", Manufacturer=Nichicon, Rated Capacitance="47 uF", Rated Ripple Current (at 100kHz)="670 mA", Rated Voltage=63V, Supplier Part Number 1=647-UCZ1J470MCS1GS, Tolerance Rated Capacitance="-20 to 20%", ComponentLink1Description="Manufacturer URL", ComponentLink1URL=http://www.nichicon.co.jp/, ComponentLink2Description=Datasheet, ComponentLink2URL=http://products.nichicon.co.jp/en/pdf/XJA043/e-ud.pdf, ComponentLink3Description="Package Specification", ComponentLink3URL=http://products.nichicon.co.jp/en/pdf/XJA043/e-ud.pdf, DatasheetVersion=08/2012, Diameter="10 mm", Endurance Time="5000 h", Impedance="0.09 Ohm", Length="10 mm", Mounting Technology="Surface Mount", PackageDescription="2-Pin Surface Mount Device, Diameter 10 mm, Height 10 mm, Pitch 8 mm", PackageReference=CAPAE-D10H10, Packing="Dia382mm Reel", PartNumber=UCZ1J470MCS1GS, RoHS=TRUE, Supplier 1=Mouser
C10 C11 C20: library part CMP-1040-01635-1, "CAP 2.2uF 100V ±10% 1812 (4532 Metric) Thickness 2.8mm SMD", Case-EIA=1812, Case-Metric=4532, Rated Voltage="100 V", Supplier Part Number 1=445-4510-2-ND, Tolerance=±10%, Max Thickness="2.8 mm", Supplier 1=Digi-Key, Technology=SMT
C12: library part CMP-1037-03512-1, "CAP 10nF 50V ±10% 1206 (3216 Metric) Thickness 1.7mm SMD", Case-EIA=1206, Case-Metric=3216, Rated Voltage="50 V", Tolerance=±10%, Max Thickness="1.7 mm", Technology=SMT
C13: library part CMP-1590-00001-1, "1206 (3216 Metric) Chip Capacitor", Case-EIA=1206, Case-Metric=3216, PackageReference=CAPC1206(3216)150, Placement=0
C14 C15: library part CMP-1664-00003-1, "Tantalum Capacitor, 68 uF, +/- 20%, 25 V, -55 to 105 degC, 2-Pin Molded, RoHS, Tape and Reel", Case/Package=2917, Max Operating Temperature="105 degC", Min Operating Temperature="-55 degC", Package Quantity=1, Supplier Part Number 1=581-TCJE686M025R0050, ComponentLink1Description="Manufacturer URL", ComponentLink1URL=http://www.kemet.com/, ComponentLink2Description=Datasheet, ComponentLink2URL=http://capacitoredge.kemet.com/capedge2/DataSheet/Datasheet-T520D337M006ATE009.pdf?pn=T520D337M006ATE009, DatasheetVersion=07/2016, Height="3.1 mm", Length="0.287 inch", Mount="Surface Mount", Mounting Technology="Surface Mount", PackageDescription="2-Pin Surface Mount Device, Body 7.3 x 4.3 mm", Packaging="Tape and Reel", PartNumber=TCJE686M025R0050, Radiation Hardening=No, REACH SVHC="No SVHC", RoHSCompliant=True, Supplier 1=Mouser, Width="0.169 inch"